# Altium PCB PCB1.PcbDoc
Units mm, origin at the board's own origin, x right, y up, seen from the top; angles counter-clockwise.
Board outline 28.19 x 14.35 mm, 2 copper layers (Top Layer, Bottom Layer); 9 components, 7 nets, 21 pads, 0 vias.
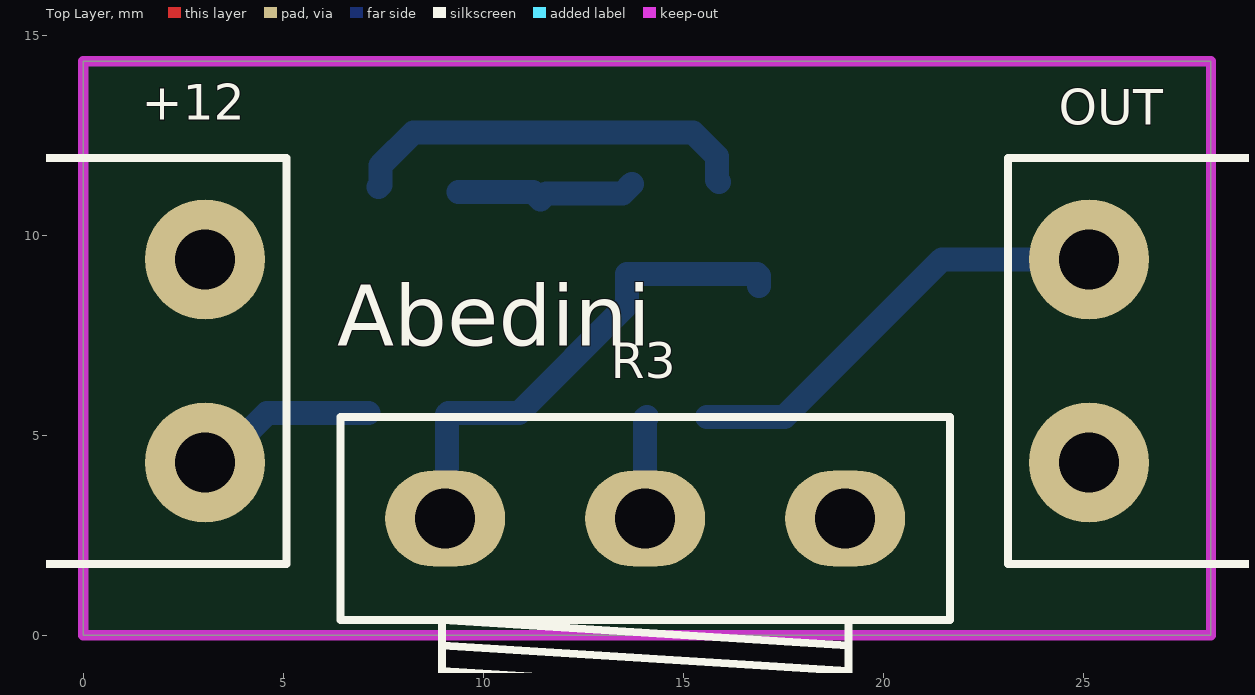
[diagram p0: Top Layer view]
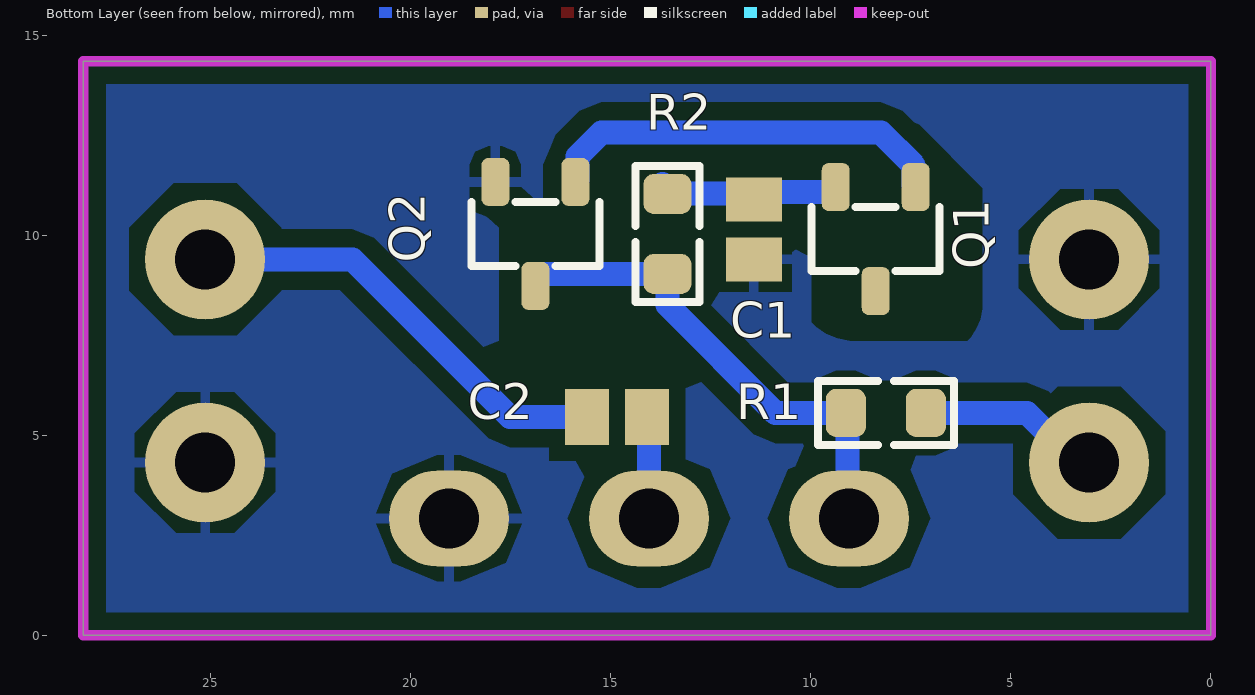
[diagram p1: Bottom Layer view, seen from below]

## Layer stack, top to bottom
Top Solder: solder mask 0.0102, Solder Resist, Dk 3.5
Top Layer: signal copper 0.0356
Dielectric 1: dielectric 0.32, FR-4, Dk 4.8
Bottom Layer: signal copper 0.0356
Bottom Solder: solder mask 0.0102, Solder Resist, Dk 3.5

## Board outline
0,0 0,14.351 28.194,14.351 28.194,0

## Design rules (kind name [scope] priority, off if disabled: settings)
Clearance [All] p1: gap=0.4 ignorepadtopadclearanceinfootprint=FALSE
PolygonConnect [All] p1: connectstyle=Relief reliefconductorwidth=0.254 reliefentries=4 polygonreliefangle="90 Angle" airgapwidth=0.254
RoutingVias [All] p1: holewidth=0.711 width=1.27 viastyle="Through Hole" minholewidth=0.711 minwidth=1.27 maxholewidth=0.711 maxwidth=1.27
SolderMaskExpansion [All] p1: expansion=0.102 istentingtop=FALSE
Width [All] p1: maxlimit=0.6 minlimit=0.254 preferedwidth=0.4 minimp=50.000000 maximp=50.000000 favimp=50.000000
30 further rules are at their usual default settings.

## Components (designator, comment, footprint, x,y, rotation, side; value= is the part's Value field where it differs from the comment)
+12 "+12V" MSTB_2 3.048,6.858 r90 top value=CONN_TB2 (schematic designator J1)
C1 "100nF" C0805 11.43,10.148 r90 bottom
C2 "100nF" C0805 14.847,5.461 r0 bottom
OUT "+12V" MSTB_2 25.146,6.858 r270 top value=CONN_TB2 (schematic designator J2)
Q1 "BC817" SOT23_3 8.382,9.906 r270 bottom
Q2 "BC817" SOT23_3 16.891,10.033 r270 bottom
R1 "6.8K" R0805 8.128,5.559 r180 bottom
R2 "4.7K" R0805 13.589,10.033 r90 bottom
R3 "POT10K" VOL_R 14.05,2.921 r180 top locked

## Footprints (in the part's own frame and the unit in brackets; to place one, negate y for a bottom-side part, rotate by r counter-clockwise, add the part's x,y. Pads: shape width x height; smd on the part's side, far side on the other; paste and mask are expansions set on the pad)
C0805 [mm] "Chip Capacitor, Body 2.0x1.3mm, IPC High Density"
  rect 1.1x1.4 smd: 1(-0.75,0) 2(0.75,0)
  body extent -1.1,-0.72 1.1,0.72, height 1.4
MSTB_2 [mm] "PHOENIX MSTB 2, 5-G, 5.08mm pitch, 2pin"
  round 3 hole 1.5: 1(-2.54,0) 2(2.54,0)
  silkscreen extent -5.08,-2.03 5.08,10.1, body extent -5,-2 5,10, height 8.7
R0805 [mm] "CHIP RESISTOR 1/8 WATT ,2.0X1.3mm, 0805, 2012"
  rrect50% 1x1.2 smd mask+0.05: 1(-1,0) 2(1,0)
  Top Layer pour cut-out: -0.5,0.8 0.5,0.8 0.5,-0.8 -0.5,-0.8
  silkscreen extent -1.7,-0.8 1.7,0.8, body extent -1.15,-0.67 1.15,0.67, height 0.76
SOT23_3 [mm] "SOT-23, Micro3, MO-178, TO-236AB, MO-193C, SuperSOT3, SC-59, 1.5x3mm, Pitch 1.9mm"
  rrect50% 1.2x0.7 smd mask+0.1: 1(-1.3,1) 2(-1.3,-1) 3(1.3,0)
  silkscreen extent -0.8,-1.6 0.8,1.6, body extent -1.32,-1.5 1.32,1.5, height 1.08
VOL_R [mm] "VOULME RIGHT ANGLE"
  oval 3x2.4 hole 1.5: 1(-5,0) 2(0,0) 3(5,0)
  silkscreen extent -7.62,-2.54 7.62,19.78, body extent -10.76,-5 10.93,27.8, height 24.54

## Part data
+12 OUT: library part CONN_MSTB_2, "CONN, PHOENIX MSTB, 5-G, 5.08mm pitch"
C1 C2: library part CAP_SMD_MLCC_0805, "CAP, MLCC, -F, -V, MATERIAL, -%, 0201", ASSEMBLY=ASSEMBLY, MANF=-, MANF_P#=MANF_PART#, PARAM="-, -%", PARAM2=-V, Price="100= 1$"
Q1 Q2: library part NPN_BC817_SOT23, "BJT, NPN, 45v, 0.5A, SMD, SOT23", MANF="NXP, ON", MANF_P#=BC817, PARAM="0.5A, Hfe100~600", PARAM2="45v, 250mW"
R1 R2: library part RES_SMD_0805, "RESISTOR, SMD", ASSEMBLY=ASSEMBLY, DESC=DESCRIPTION, DIST#=MOUSER, MANF=-, MANF_P#=-, PARAM=-W, PARAM2=1%, Price="100= 0.5$"
R3: library part RES_THD_POT_VOL, "RESISTOR, THD, Potentiometer Volume"

## Nets (pads, with @x,y where several pads share a name; then routed paths per layer and width w, separated by ;. In a path a pad name is that pad's centre, name@x,y a point inside that pad or via, vN(x,y) a via of type N, cw(c..) or ccw(c..) an arc to the next point about the centre after c; other vN are vias at no path point)
GND: +12.2 C1.1 OUT.2 Q2.2 R3.1
NetC1_2: C1.2 Q1.2 R2.2 | length 4.6
  Bottom Layer w0.6: Q1.2@9.382,11.079 11.249,11.079 C1.2 11.581,11.049 13.478,11.049 R2.2@13.716,11.287
NetC2_1: C2.1 R3.2 | length 2.6
  Bottom Layer w0.6: R3.2 14.05,5.414 C2.1
NetC2_2: C2.2 OUT.1 | length 11.2
  Bottom Layer w0.6: C2.2 17.526,5.461 21.463,9.398 OUT.1
NetQ1_1: Q1.1 Q2.1 | length 10.2
  Bottom Layer w0.6: Q1.1 7.432,11.256 7.432,11.75 8.255,12.573 15.24,12.573 15.841,11.972 15.841,11.383 Q2.1
NetQ2_3: Q2.3 R1.1 R2.1 R3.3 | length 12.6
  Bottom Layer w0.6: R3.3 9.089,2.96 9.089,5.52 R1.1 10.893,5.559 13.589,8.255 R2.1 16.841,9.033 16.891,8.983 Q2.3
VCC: +12.1 R1.2 | length 4.5
  Bottom Layer w0.6: +12.1@3.175,4.318 3.358,4.318 4.599,5.559 R1.2
pads on no net: Q1.3

## Polygon pours and split planes (outlines as drawn)
GND on Bottom Layer "GND_L02_P000" (solid, remove dead copper, pour order 0): 28.067,14.224 28.067,0.127 0.127,0.127 0.127,14.224

## Keep-outs
Keep-Out Layer:
  the board outline again, w0.254

## Other copper
Bottom Layer:
  pour cut-out: 14.478,11.303 14.478,10.318 ccw(c16.989,7.688) 13.532,6.561 17.326,6.295 ccw(c16.56,7.314) 17.795,7 17.795,10.399 14.699,11.176 ccw(c14.699,11.097) 14.643,11.153
  pour cut-out: 9.982,9.906 9.982,7.823 cw(c8.879,8.926) 8.879,7.366 6.096,7.366 cw(c7.016,8.286) 5.715,8.286 5.715,11.176 7.276,12.737 cw(c7.493,12.52) 7.493,12.827
  pour cut-out: 9.982,9.906 9.982,8.077 9.398,7.493 6.477,7.493 6.477,10.673 6.585,10.781
  pour cut-out: 9.982,10.706 9.982,9.106 6.782,9.106 6.782,10.706

## Silkscreen, mask and mechanical layers (free items; w line width, h text height)
Top Overlay:
  text "Abedini" at 6.35,7.239 h1.52

## Dimensions
0,14.351 to 28.067,14.224 on Mechanical 13
0,14.351 to 0.127,0.127 on Mechanical 13